# Altium PCB Deck_PCBV1.PcbDoc
Units mm, origin at the board's own origin, x right, y up, seen from the top; angles counter-clockwise.
Board outline 90 x 50 mm, 2 copper layers (Top Layer, Bottom Layer); 28 components, 24 nets, 128 pads, 29 vias.
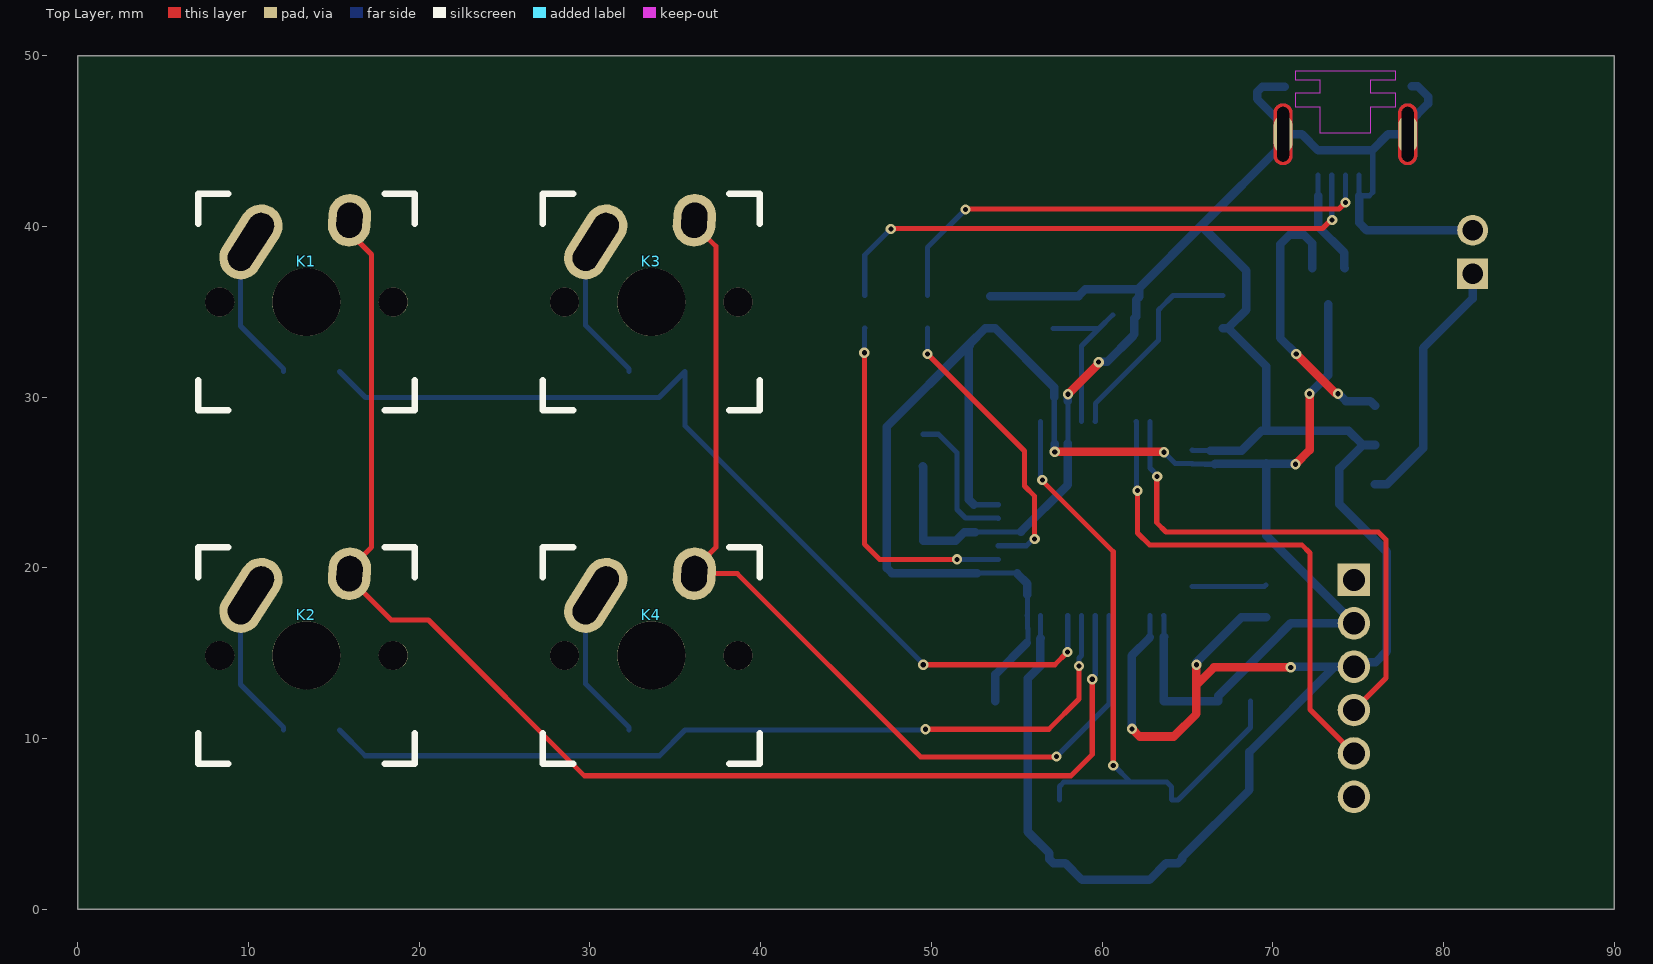
[diagram p0: Top Layer view]
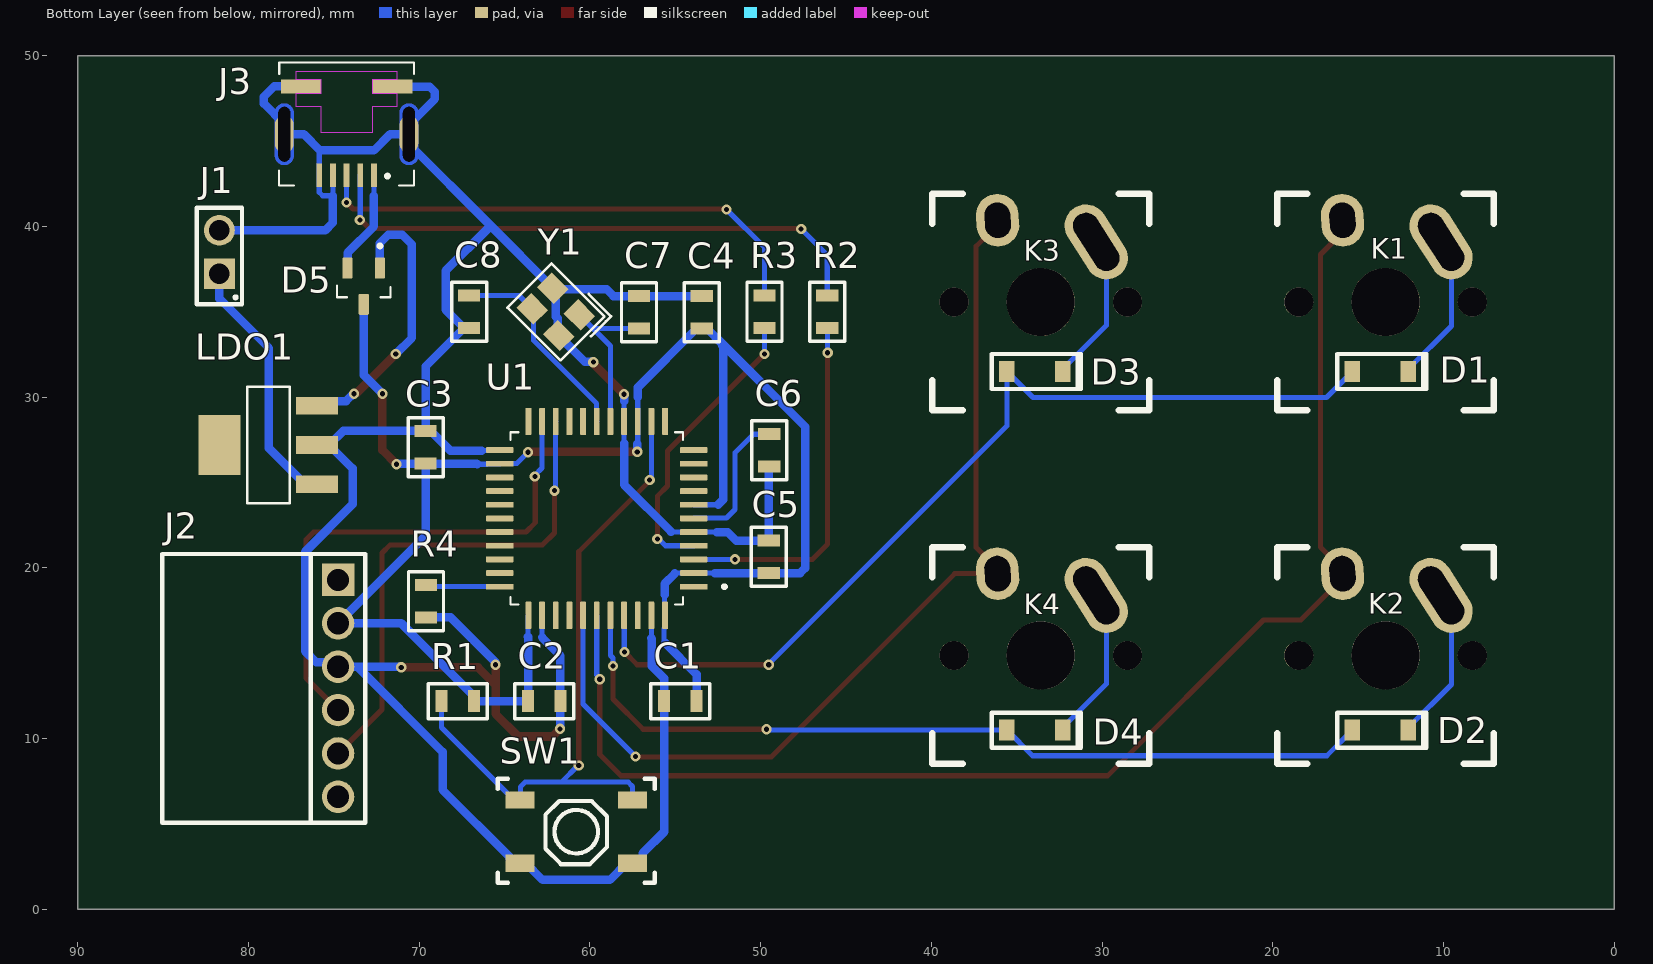
[diagram p1: Bottom Layer view, seen from below]
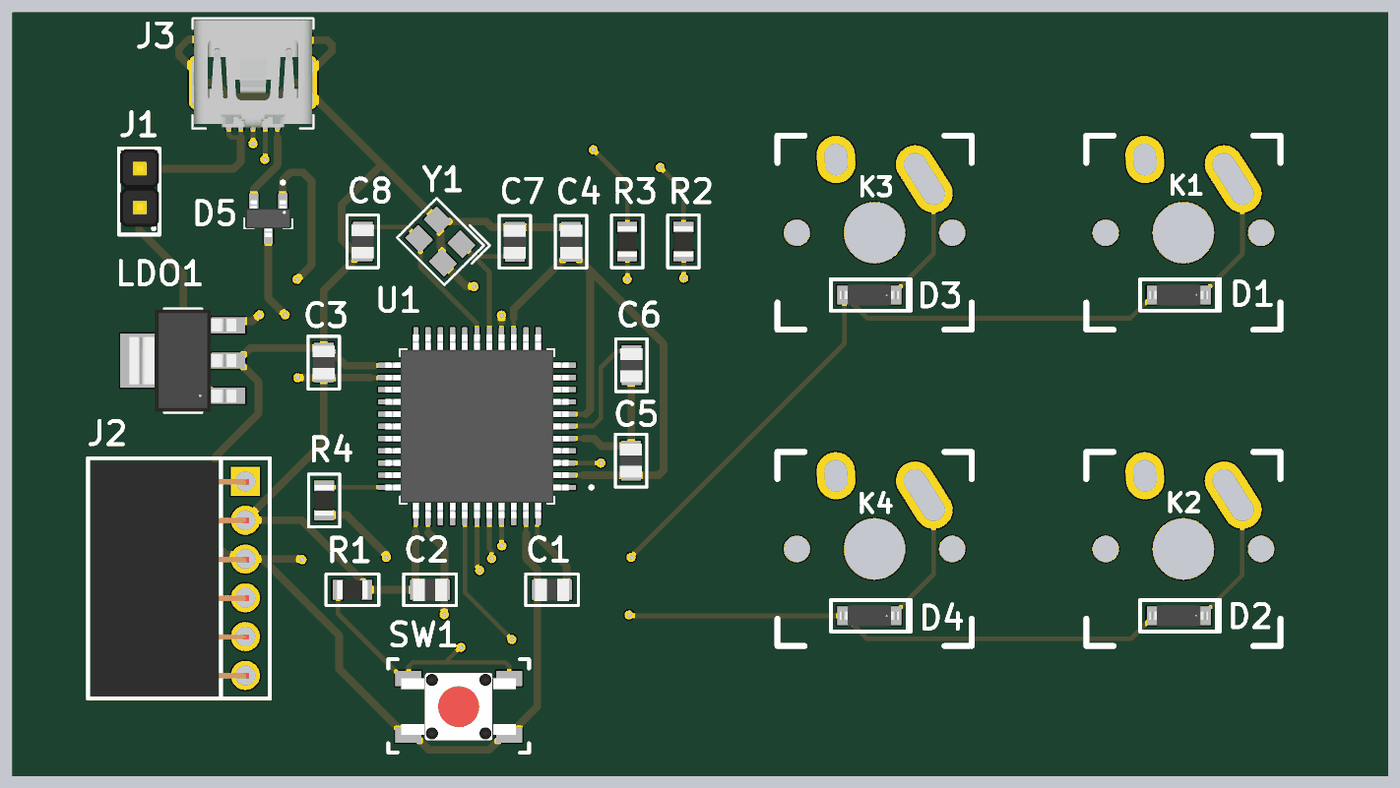
[diagram p2: 3D render of the assembled board from below, using the file's embedded part models]

## Layer stack, top to bottom
Top Solder: solder mask 0.0102, Solder Resist, Dk 3.5
Top Layer: signal copper 0.0356
Dielectric 1: dielectric 0.32, FR-4, Dk 4.8
Bottom Layer: signal copper 0.0356
Bottom Solder: solder mask 0.0102, Solder Resist, Dk 3.5

## Board outline
0,0 90,0 90,50 0,50

## Design rules (kind name [scope] priority, off if disabled: settings)
Clearance [All] p1: gap=0.2 ignorepadtopadclearanceinfootprint=TRUE
HoleSize [All] p1: absolutevalues=TRUE maxlimit=6 minlimit=0.025 maxpercent=80.000 minpercent=20.000
PolygonConnect [All] p1: connectstyle=Relief reliefconductorwidth=0.254 reliefentries=4 polygonreliefangle="90 Angle" airgapwidth=0.254
RoutingVias [All] p1: holewidth=0.3 width=0.6 viastyle="Through Hole" minholewidth=0.3 minwidth=0.6 maxholewidth=0.3 maxwidth=0.6
SMDNeckDown [All] p1: percent=100.000
SolderMaskExpansion [All] p1: expansion=0.102 istentingtop=FALSE
Width [All] p1: maxlimit=0.5 minlimit=0.2 preferedwidth=0.3
29 further rules are at their usual default settings.

## Components (designator, comment, footprint, x,y, rotation, side; value= is the part's Value field where it differs from the comment)
C1 "C 0.1uf" C0805 54.7,12.2 r180 bottom
C2 "C 0.1uf" C0805 62.675,12.2 r0 bottom
C3 "C 0.1uf" C0805 69.625,27.075 r270 bottom
C4 "C 0.1uf" C0805 53.45,34.975 r270 bottom
C5 "C 4.7uf" C0805 49.525,20.65 r270 bottom
C6 "C 1uf" C0805 49.5,26.9 r90 bottom
C7 "C 22pf" C0805 57.125,34.975 r270 bottom
C8 "C 22pf" C0805 67.075,35 r90 bottom
D1 "Diode" Diode 13.7,31.5 r0 bottom
D2 "Diode" Diode 13.7,10.5 r0 bottom
D3 "Diode" Diode 33.938,31.5 r0 bottom
D4 "Diode" Diode 33.938,10.5 r0 bottom
D5 "Schottky diode" SOT95P237X111-3N 73.25,36.5 r270 bottom
J1 "Battery" HDR-TH_2P-P2.54-V-M-1 81.7,38.5 r90 bottom
J2 "Header" HDR-TH_6P-P2.54-H-W8.6_A2541HWR-6P 74.75,12.945 r270 bottom
J3 "USB" USB 74.25,49.1 r0 bottom
K1 "Switch" Mx_Alps_100 13.399,35.574 r0 top
K2 "Switch" Mx_Alps_100 13.4,14.874 r0 top
K3 "Switch" Mx_Alps_100 33.599,35.574 r0 top
K4 "Switch" Mx_Alps_100 33.599,14.874 r0 top
LDO1 "5V regulator" SOT-223_L6.5-W3.5-P2.30-LS7.0-BR 78.842,27.2 r180 bottom
R1 "R 10kohm" R0805 67.75,12.2 r0 bottom
R2 "R 22ohm" R0805 46.1,35 r90 bottom
R3 "R 22ohm" R0805 49.775,35 r90 bottom
R4 "R 10kohm" R0805 69.6,18.05 r270 bottom
SW1 "Button" SW-SMD_4P-L5.1-W5.1-P3.70-LS6.5-TL-2 60.8,4.55 r180 bottom
U1 "ATMEGA32U4" ATMEGA32U2-AUR 59.6,22.9 r0 bottom
Y1 "Crystal" CRYSTAL-SMD_4P-L3.2-W2.5-BL 62,35 r45 bottom (schematic designator CRYSTAL1)

## Footprints (in the part's own frame and the unit in brackets; to place one, negate y for a bottom-side part, rotate by r counter-clockwise, add the part's x,y. Pads: shape width x height; smd on the part's side, far side on the other; paste and mask are expansions set on the pad)
ATMEGA32U2-AUR [mm]
  rrect25% 1.6x0.34 smd: 1(-5.68,4) 2(-5.68,3.2) 3(-5.68,2.4) 4(-5.68,1.6) 5(-5.68,0.8) 6(-5.68,0) 7(-5.68,-0.8) 8(-5.68,-1.6) 9(-5.68,-2.4) 10(-5.68,-3.2) 11(-5.68,-4) 23(5.68,-4) 24(5.68,-3.2) 25(5.68,-2.4) 26(5.68,-1.6) 27(5.68,-0.8) 28(5.68,0) 29(5.68,0.8) 30(5.68,1.6) 31(5.68,2.4) 32(5.68,3.2) 33(5.68,4)
  rrect25% 0.34x1.6 smd: 12(-4,-5.68) 13(-3.2,-5.68) 14(-2.4,-5.68) 15(-1.6,-5.68) 16(-0.8,-5.68) 17(0,-5.68) 18(0.8,-5.68) 19(1.6,-5.68) 20(2.4,-5.68) 21(3.2,-5.68) 22(4,-5.68) 34(4,5.68) 35(3.2,5.68) 36(2.4,5.68) 37(1.6,5.68) 38(0.8,5.68) 39(0,5.68) 40(-0.8,5.68) 41(-1.6,5.68) 42(-2.4,5.68) 43(-3.2,5.68) 44(-4,5.68)
  silkscreen extent -7.58,-5.05 5.05,5.05, body extent -6,-6 6,6, height 1.21
C0805 [mm]
  rect 0.7x1.3 smd: 1(-0.95,0) 2(0.95,0)
  silkscreen extent -1.72,-1.02 1.72,1.02, body extent -1.1,-0.72 1.11,0.72, height 1.45
CRYSTAL-SMD_4P-L3.2-W2.5-BL [mm]
  rect 1.4x1.2 smd: 1(-1.1,-0.85) 2(1.1,-0.85) 3(1.1,0.85) 4(-1.1,0.85)
  silkscreen extent -2.48,-2.1 2.17,1.82
Diode [mil]
  rect 36x48 smd: 1(-64.5,0) 2(64.5,0)
  silkscreen extent -109,-40 99,40, body extent -76,-27 76,27, height 32
HDR-TH_2P-P2.54-V-M-1 [mm]
  rect 1.8x1.8 hole 1.2: 1(-1.27,0)
  round 1.8 hole 1.2: 2(1.27,0)
  silkscreen extent -3.05,-1.33 2.6,1.33, body extent -2.54,-1.3 2.54,1.24, height 8
HDR-TH_6P-P2.54-H-W8.6_A2541HWR-6P [mm]
  rect 1.9x1.9 hole 1.3: 1(-6.35,0)
  round 1.9 hole 1.3: 2(-3.81,0) 3(-1.27,0) 4(1.27,0) 5(3.81,0) 6(6.35,0)
  silkscreen extent -7.87,-10.3 7.87,1.6, body extent -7.6,-10.12 7.64,0.23, height 2.5
Mx_Alps_100 [mil]
  rrect100% 98.43x187.01 hole 147.64 slot 59.06 at 147.5 deg rot 147.5: 1(-128.15,138.58)
  rrect100% 98.43x121.26 hole 81.89 slot 59.06 at 176.1 deg rot 176.1: 2(99.21,188.58)
  round 157 hole 157: Un1(0,0)
  round 67 hole 67: Un2(-200,0) Un3(200,0)
  silkscreen extent -250,-250 250,250
R0805 [mm]
  rect 0.7x1.3 smd: 1(-0.95,0) 2(0.95,0)
  silkscreen extent -1.72,-1.02 1.72,1.02, body extent -1,-0.62 1,0.63, height 0.5
SOT95P237X111-3N [mm]
  rrect25% 1.23x0.6 smd: 1(-1.06,0.95) 2(-1.06,-0.95) 3(1.06,0)
  silkscreen extent -2.46,-1.56 0.65,1.56, body extent -1.2,-1.45 1.2,1.45, height 1.11
SOT-223_L6.5-W3.5-P2.30-LS7.0-BR [mm]
  rect 2.465x1.05 smd: 1(2.857,-2.3) 2(2.857,0) 3(2.857,2.3)
  rect 2.465x3.54 smd: 4(-2.858,0)
  silkscreen extent -1.22,-3.4 1.25,3.4, body extent -3.5,-3.35 3.5,3.35, height 1.81
SW-SMD_4P-L5.1-W5.1-P3.70-LS6.5-TL-2 [mm]
  rect 1.7x1 smd: 1(-3.3,1.849) 2(3.3,1.85) 3(-3.3,-1.85) 4(3.3,-1.85)
  silkscreen extent -4.6,-3 4.6,3.1, body extent -3.75,-2.25 3.75,2.25, height 3.8
USB [mm]
  rect 0.34x1.4 smd: 1(-1.6,6.1) 2(-0.8,6.1) 3(0,6.1) 4(0.8,6.1) 5(1.6,6.1)
  oval 1.1x2.2 hole 0.7 slot 3.2 at 90 deg: S1(-3.65,3.7) S2(3.65,3.7)
  rect 2.35x0.8 smd: S3(-2.675,0.9) S4(2.675,0.9)
  Top Layer region: 3.679,5.499 3.707,5.497 3.736,5.493 3.764,5.488 3.792,5.481 3.82,5.473 3.847,5.463 3.874,5.452 3.9,5.44 3.925,5.426 3.95,5.411 3.973,5.395 3.996,5.377 4.018,5.359 4.039,5.339 4.059,5.318 4.077,5.296 4.095,5.273 4.111,5.25 4.126,5.225 4.14,5.2 4.152,5.174 4.163,5.147 4.173,5.12 4.181,5.092 4.188,5.064 4.193,5.036 4.197,5.007 4.199,4.979 4.2,4.95 4.2,2.45 4.199,2.421 4.197,2.393 4.193,2.364 4.188,2.336 4.181,2.308 4.173,2.28 4.163,2.253 4.152,2.226 4.14,2.2 4.126,2.175 4.111,2.15 4.095,2.127 4.077,2.104 4.059,2.082 4.039,2.061 4.018,2.041 3.996,2.023 3.973,2.005 3.95,1.989 3.925,1.974 3.9,1.96 3.874,1.948 3.847,1.937 3.82,1.927 3.792,1.919 3.764,1.912 3.736,1.907 3.707,1.903 3.679,1.901 3.65,1.9 3.621,1.901 3.593,1.903 3.564,1.907 3.536,1.912 3.508,1.919 3.48,1.927 3.453,1.937 3.426,1.948 3.4,1.96 3.375,1.974 3.35,1.989 3.327,2.005 3.304,2.023 3.282,2.041 3.261,2.061 3.241,2.082 3.223,2.104 3.205,2.127 3.189,2.15 3.174,2.175 3.16,2.2 3.148,2.226 3.137,2.253 3.127,2.28 3.119,2.308 3.112,2.336 3.107,2.364 3.103,2.393 3.101,2.421 3.1,2.45 3.1,4.95 3.101,4.979 3.103,5.007 3.107,5.036 3.112,5.064 3.119,5.092 3.127,5.12 3.137,5.147 3.148,5.174 3.16,5.2 3.174,5.225 3.189,5.25 3.205,5.273 3.223,5.296 3.241,5.318 3.261,5.339 3.282,5.359 3.304,5.377 3.327,5.395 3.35,5.411 3.375,5.426 3.4,5.44 3.426,5.452 3.453,5.463 3.48,5.473 3.508,5.481 3.536,5.488 3.564,5.493 3.593,5.497 3.621,5.499 3.65,5.5
  Top Layer region: -3.621,5.499 -3.593,5.497 -3.564,5.493 -3.536,5.488 -3.508,5.481 -3.48,5.473 -3.453,5.463 -3.426,5.452 -3.4,5.44 -3.375,5.426 -3.35,5.411 -3.327,5.395 -3.304,5.377 -3.282,5.359 -3.261,5.339 -3.241,5.318 -3.223,5.296 -3.205,5.273 -3.189,5.25 -3.174,5.225 -3.16,5.2 -3.148,5.174 -3.137,5.147 -3.127,5.12 -3.119,5.092 -3.112,5.064 -3.107,5.036 -3.103,5.007 -3.101,4.979 -3.1,4.95 -3.1,2.45 -3.101,2.421 -3.103,2.393 -3.107,2.364 -3.112,2.336 -3.119,2.308 -3.127,2.28 -3.137,2.253 -3.148,2.226 -3.16,2.2 -3.174,2.175 -3.189,2.15 -3.205,2.127 -3.223,2.104 -3.241,2.082 -3.261,2.061 -3.282,2.041 -3.304,2.023 -3.327,2.005 -3.35,1.989 -3.375,1.974 -3.4,1.96 -3.426,1.948 -3.453,1.937 -3.48,1.927 -3.508,1.919 -3.536,1.912 -3.564,1.907 -3.593,1.903 -3.621,1.901 -3.65,1.9 -3.679,1.901 -3.707,1.903 -3.736,1.907 -3.764,1.912 -3.792,1.919 -3.82,1.927 -3.847,1.937 -3.874,1.948 -3.9,1.96 -3.925,1.974 -3.95,1.989 -3.973,2.005 -3.996,2.023 -4.018,2.041 -4.039,2.061 -4.059,2.082 -4.077,2.104 -4.095,2.127 -4.111,2.15 -4.126,2.175 -4.14,2.2 -4.152,2.226 -4.163,2.253 -4.173,2.28 -4.181,2.308 -4.188,2.336 -4.193,2.364 -4.197,2.393 -4.199,2.421 -4.2,2.45 -4.2,4.95 -4.199,4.979 -4.197,5.007 -4.193,5.036 -4.188,5.064 -4.181,5.092 -4.173,5.12 -4.163,5.147 -4.152,5.174 -4.14,5.2 -4.126,5.225 -4.111,5.25 -4.095,5.273 -4.077,5.296 -4.059,5.318 -4.039,5.339 -4.018,5.359 -3.996,5.377 -3.973,5.395 -3.95,5.411 -3.925,5.426 -3.9,5.44 -3.874,5.452 -3.847,5.463 -3.82,5.473 -3.792,5.481 -3.764,5.488 -3.736,5.493 -3.707,5.497 -3.679,5.499 -3.65,5.5
  Bottom Layer region: -3.621,5.499 -3.593,5.497 -3.564,5.493 -3.536,5.488 -3.508,5.481 -3.48,5.473 -3.453,5.463 -3.426,5.452 -3.4,5.44 -3.375,5.426 -3.35,5.411 -3.327,5.395 -3.304,5.377 -3.282,5.359 -3.261,5.339 -3.241,5.318 -3.223,5.296 -3.205,5.273 -3.189,5.25 -3.174,5.225 -3.16,5.2 -3.148,5.174 -3.137,5.147 -3.127,5.12 -3.119,5.092 -3.112,5.064 -3.107,5.036 -3.103,5.007 -3.101,4.979 -3.1,4.95 -3.1,2.45 -3.101,2.421 -3.103,2.393 -3.107,2.364 -3.112,2.336 -3.119,2.308 -3.127,2.28 -3.137,2.253 -3.148,2.226 -3.16,2.2 -3.174,2.175 -3.189,2.15 -3.205,2.127 -3.223,2.104 -3.241,2.082 -3.261,2.061 -3.282,2.041 -3.304,2.023 -3.327,2.005 -3.35,1.989 -3.375,1.974 -3.4,1.96 -3.426,1.948 -3.453,1.937 -3.48,1.927 -3.508,1.919 -3.536,1.912 -3.564,1.907 -3.593,1.903 -3.621,1.901 -3.65,1.9 -3.679,1.901 -3.707,1.903 -3.736,1.907 -3.764,1.912 -3.792,1.919 -3.82,1.927 -3.847,1.937 -3.874,1.948 -3.9,1.96 -3.925,1.974 -3.95,1.989 -3.973,2.005 -3.996,2.023 -4.018,2.041 -4.039,2.061 -4.059,2.082 -4.077,2.104 -4.095,2.127 -4.111,2.15 -4.126,2.175 -4.14,2.2 -4.152,2.226 -4.163,2.253 -4.173,2.28 -4.181,2.308 -4.188,2.336 -4.193,2.364 -4.197,2.393 -4.199,2.421 -4.2,2.45 -4.2,4.95 -4.199,4.979 -4.197,5.007 -4.193,5.036 -4.188,5.064 -4.181,5.092 -4.173,5.12 -4.163,5.147 -4.152,5.174 -4.14,5.2 -4.126,5.225 -4.111,5.25 -4.095,5.273 -4.077,5.296 -4.059,5.318 -4.039,5.339 -4.018,5.359 -3.996,5.377 -3.973,5.395 -3.95,5.411 -3.925,5.426 -3.9,5.44 -3.874,5.452 -3.847,5.463 -3.82,5.473 -3.792,5.481 -3.764,5.488 -3.736,5.493 -3.707,5.497 -3.679,5.499 -3.65,5.5
  Bottom Layer region: 3.679,5.499 3.707,5.497 3.736,5.493 3.764,5.488 3.792,5.481 3.82,5.473 3.847,5.463 3.874,5.452 3.9,5.44 3.925,5.426 3.95,5.411 3.973,5.395 3.996,5.377 4.018,5.359 4.039,5.339 4.059,5.318 4.077,5.296 4.095,5.273 4.111,5.25 4.126,5.225 4.14,5.2 4.152,5.174 4.163,5.147 4.173,5.12 4.181,5.092 4.188,5.064 4.193,5.036 4.197,5.007 4.199,4.979 4.2,4.95 4.2,2.45 4.199,2.421 4.197,2.393 4.193,2.364 4.188,2.336 4.181,2.308 4.173,2.28 4.163,2.253 4.152,2.226 4.14,2.2 4.126,2.175 4.111,2.15 4.095,2.127 4.077,2.104 4.059,2.082 4.039,2.061 4.018,2.041 3.996,2.023 3.973,2.005 3.95,1.989 3.925,1.974 3.9,1.96 3.874,1.948 3.847,1.937 3.82,1.927 3.792,1.919 3.764,1.912 3.736,1.907 3.707,1.903 3.679,1.901 3.65,1.9 3.621,1.901 3.593,1.903 3.564,1.907 3.536,1.912 3.508,1.919 3.48,1.927 3.453,1.937 3.426,1.948 3.4,1.96 3.375,1.974 3.35,1.989 3.327,2.005 3.304,2.023 3.282,2.041 3.261,2.061 3.241,2.082 3.223,2.104 3.205,2.127 3.189,2.15 3.174,2.175 3.16,2.2 3.148,2.226 3.137,2.253 3.127,2.28 3.119,2.308 3.112,2.336 3.107,2.364 3.103,2.393 3.101,2.421 3.1,2.45 3.1,4.95 3.101,4.979 3.103,5.007 3.107,5.036 3.112,5.064 3.119,5.092 3.127,5.12 3.137,5.147 3.148,5.174 3.16,5.2 3.174,5.225 3.189,5.25 3.205,5.273 3.223,5.296 3.241,5.318 3.261,5.339 3.282,5.359 3.304,5.377 3.327,5.395 3.35,5.411 3.375,5.426 3.4,5.44 3.426,5.452 3.453,5.463 3.48,5.473 3.508,5.481 3.536,5.488 3.564,5.493 3.593,5.497 3.621,5.499 3.65,5.5
  Keep-Out Layer region: 1.5,2.1 2.95,2.1 2.95,1.3 1.5,1.3 1.5,0.5 2.95,0.5 2.95,0 -2.95,0 -2.95,0.5 -1.5,0.5 -1.5,1.3 -2.95,1.3 -2.95,2.1 -1.5,2.1 -1.5,3.6 1.5,3.6
  silkscreen extent -3.95,-0.5 3.96,6.71, body extent -3.85,-0.38 3.85,6.62, height 3.94

## Part data
C1 C2 C3 C4: library part CC0805ZRY5V9BB104, "YAGEO (PHYCOMP)         CC0805ZRY5V9BB104             SMD Multilayer Ceramic Capacitor, 0805 [2012 Metric], 0.1 F, 50 V, +80%, -20%, Y5V, CC Series", Capacitance=100nF, Case Code (Imperial)=0805, Case Code (Metric)=2012, Dielectric=Y5V, Dielectric Material=Ceramic, Manufacturer=Yageo, Max Operating Temperature=85°C, Min Operating Temperature=-30°C, Package Quantity=1, Supplier Part Number 1=311-1361-1-ND, Tolerance=80%, Voltage Rating=50V, Case/Package=0805, Category="Ceramic Capacitors", ComponentLink1Description=https://datasheet.ciiva.com/144/mlccorderingcode-144209.pdf?src-supplier=Digi-Key, ComponentLink1URL=https://datasheet.ciiva.com/144/mlccorderingcode-144209.pdf?src-supplier=Digi-Key, ComponentLink2Description=https://datasheet.ciiva.com/144/mlccorderingcode-144210.pdf?src-supplier=Digi-Key, ComponentLink2URL=https://datasheet.ciiva.com/144/mlccorderingcode-144210.pdf?src-supplier=Digi-Key, ComponentLink3Description=https://datasheet.ciiva.com/144/mlccorderingcode-144211.pdf?src-supplier=Digi-Key, ComponentLink3URL=https://datasheet.ciiva.com/144/mlccorderingcode-144211.pdf?src-supplier=Digi-Key, ComponentLink4Description=https://datasheet.ciiva.com/15189/getdatasheetpartid-55882-15189238.pdf?src-supplier=Verical, ComponentLink4URL=https://datasheet.ciiva.com/15189/getdatasheetpartid-55882-15189238.pdf?src-supplier=Verical, ComponentLink5Description=https://datasheet.ciiva.com/28450/1132289-28450870.pdf?src-supplier=Element14, ComponentLink5URL=https://datasheet.ciiva.com/28450/1132289-28450870.pdf?src-supplier=Element14, ComponentLink6Description=https://datasheet.ciiva.com/13389/upy-gp-np0-16v-to-50v-8-13389351.pdf?src-supplier=Mouser, ComponentLink6URL=https://datasheet.ciiva.com/13389/upy-gp-np0-16v-to-50v-8-13389351.pdf?src-supplier=Mouser, ComponentLink7Description=https://datasheet.ciiva.com/11465/upy-gphc-y5v-6-3v-to-50v-5-11465865.pdf?src-supplier=Avnet, ComponentLink7URL=https://datasheet.ciiva.com/11465/upy-gphc-y5v-6-3v-to-50v-5-11465865.pdf?src-supplier=Avnet, ComponentLink8Description=https://datasheet.ciiva.com/16747/upy-gphc-y5v-6-3v-to-50v-5-revised-16747323.pdf?src-supplier=Future+Electronics, ComponentLink8URL=https://datasheet.ciiva.com/16747/upy-gphc-y5v-6-3v-to-50v-5-revised-16747323.pdf?src-supplier=Future+Electronics, ComponentLink9Description=https://datasheet.ciiva.com/17435/upy-gphc-y5v-6-3v-to-50v-5-17435053.pdf?src-supplier=Avnet+Europe, ComponentLink9URL=https://datasheet.ciiva.com/17435/upy-gphc-y5v-6-3v-to-50v-5-17435053.pdf?src-supplier=Avnet+Europe, ComponentLink10Description=https://datasheet.ciiva.com/29241/445331-da-01-en-kerko-chip-0805-y5v0-1uf-20-80proz50vg-29241946.pdf?src-supplier=Conrad, ComponentLink10URL=https://datasheet.ciiva.com/29241/445331-da-01-en-kerko-chip-0805-y5v0-1uf-20-80proz50vg-29241946.pdf?src-supplier=Conrad, Construction=Flat, Depth=1.25mm, Halogen Free="Halogen Free", Height=0.6mm, Lead Free="Lead Free", Length=2mm, Manufacturer Part Number=CC0805ZRY5V9BB104, Material=Ceramic, Mount="Surface Mount", Number of Pins=2, Packaging="Tape and Reel", Pricing 1="1=0.10000, 10=0.07000, 50=0.03800, 100=0.03100, 500=0.02214, 1000=0.01739 (USD)", Radiation Hardening=No, REACH SVHC="No SVHC", Resistor Type=Ceramic, RoHS=Yes, RoHS Compliant=Yes, Series=CC, Stock 1=165123, Supplier 1=Digi-Key, Termination=SMD/SMT, Thickness=0.024inch, Voltage Rating (DC)=50V, Width=0.049inch
C5: library part CL21A475KAQNNNE, "SAMSUNG ELECTRO-MECHANICS - CL21A475KAQNNNE - SMD Multilayer Ceramic Capacitor, 4.7 µF, 25 V, 0805 [2012 Metric], ± 10%, X5R, CL Series", Capacitance=4.7uF, Case Code (Imperial)=0805, Case Code (Metric)=2012, Dielectric=X5R, Manufacturer=Samsung, Max Operating Temperature=85°C, Min Operating Temperature=-55°C, Package Quantity=1, Supplier Part Number 1=1276-1244-1-ND, Tolerance=10%, Voltage Rating=25V, Case/Package=0805, Category="Ceramic Capacitors", ComponentLink1Description=https://datasheet.ciiva.com/25798/cl21a475kaqnnne-25798882.pdf?src-supplier=Digi-Key, ComponentLink1URL=https://datasheet.ciiva.com/25798/cl21a475kaqnnne-25798882.pdf?src-supplier=Digi-Key, Construction=Flat, Depth=1.25mm, Height=1.25mm, Lead Free="Lead Free", Length=2mm, Manufacturer Part Number=CL21A475KAQNNNE, Mount="Surface Mount", Packaging="Tape and Reel", Pricing 1="1=0.12000, 10=0.08300, 50=0.04700, 100=0.03890, 500=0.02728, 1000=0.02259 (USD)", Radiation Hardening=No, RoHS=Yes, RoHS Compliant=Yes, Series=CL, Supplier 1=Digi-Key, Thickness=0.055inch, Voltage Rating (DC)=25V, Width=0.049inch
C6: library part CL21B105KBFNNNE, "SAMSUNG ELECTRO-MECHANICS - CL21B105KBFNNNE - SMD Multilayer Ceramic Capacitor, 1 µF, 50 V, 0805 [2012 Metric], ± 10%, X7R, CL Series", Capacitance=1uF, Case Code (Imperial)=0805, Case Code (Metric)=2012, Dielectric=X7R, Manufacturer=Samsung, Max Operating Temperature=125°C, Min Operating Temperature=-55°C, Package Quantity=1, Supplier Part Number 1=1276-1029-1-ND, Tolerance=10%, Voltage=50V, Case/Package=0805, Category="Ceramic Capacitors", ComponentLink1Description=https://datasheet.ciiva.com/25800/cl21b105kbfnnne-25800291.pdf?src-supplier=Digi-Key, ComponentLink1URL=https://datasheet.ciiva.com/25800/cl21b105kbfnnne-25800291.pdf?src-supplier=Digi-Key, ComponentLink2Description=https://datasheet.ciiva.com/16449/cl21b105kbfnnne-16449003.pdf?src-supplier=Future+Electronics, ComponentLink2URL=https://datasheet.ciiva.com/16449/cl21b105kbfnnne-16449003.pdf?src-supplier=Future+Electronics, ComponentLink3Description=https://datasheet.ciiva.com/26838/getdatasheetpartid-354075-26838668.pdf?src-supplier=Verical, ComponentLink3URL=https://datasheet.ciiva.com/26838/getdatasheetpartid-354075-26838668.pdf?src-supplier=Verical, Construction=Flat, Depth=1.25mm, Height=1.25mm, Length=2mm, Manufacturer Part Number=CL21B105KBFNNNE, Mount="Surface Mount", Packaging="Tape and Reel", Pricing 1="1=0.13000, 10=0.09000, 50=0.05120, 100=0.04250, 500=0.02978, 1000=0.02465 (USD)", Radiation Hardening=No, RoHS=Yes, RoHS Compliant=Yes, Series=CL, Supplier 1=Digi-Key, Thickness=0.053inch, Voltage Rating=50V, Width=0.049inch
C7 C8: library part CL21C220JBANNNC, "Cap Ceramic 22pF 50V C0G 5% SMD 0805 125C T/R", Capacitance=22pF, Case Code (Imperial)=0805, Case Code (Metric)=2012, Dielectric=C0G, Manufacturer=Samsung, Max Operating Temperature=125°C, Min Operating Temperature=-55°C, Package Quantity=1, Supplier Part Number 1=1276-1047-1-ND, Temperature Coefficient=300ppm/°C, Tolerance=5%, Voltage=50V, Case/Package=0805, Category="Ceramic Capacitors", ComponentLink1Description=https://datasheet.ciiva.com/25801/cl21c220jbannnc-25801668.pdf?src-supplier=Digi-Key, ComponentLink1URL=https://datasheet.ciiva.com/25801/cl21c220jbannnc-25801668.pdf?src-supplier=Digi-Key, ComponentLink2Description=https://datasheet.ciiva.com/15227/getdatasheetpartid-355345-15227198.pdf?src-supplier=Verical, ComponentLink2URL=https://datasheet.ciiva.com/15227/getdatasheetpartid-355345-15227198.pdf?src-supplier=Verical, ComponentLink3Description=https://datasheet.ciiva.com/29199/454687-da-01-en-vs-kondensator-0805-29199501.pdf?src-supplier=Conrad, ComponentLink3URL=https://datasheet.ciiva.com/29199/454687-da-01-en-vs-kondensator-0805-29199501.pdf?src-supplier=Conrad, ComponentLink4Description=https://datasheet.ciiva.com/16387/cl05b104kq5nnnc-16387287.pdf?src-supplier=Future+Electronics, ComponentLink4URL=https://datasheet.ciiva.com/16387/cl05b104kq5nnnc-16387287.pdf?src-supplier=Future+Electronics, Contact Plating=Tin, Depth=1.25mm, Height=0.65mm, Lead Free="Lead Free", Length=2mm, Manufacturer Part Number=CL21C220JBANNNC, Material=Ceramic, Mount="Surface Mount", Packaging="Tape and Reel", Pricing 1="1=0.10000, 10=0.05400, 50=0.02940, 100=0.02390, 500=0.01710, 1000=0.01344 (USD)", Radiation Hardening=No, RoHS=Yes, Stock 1=3782, Supplier 1=Digi-Key, Thickness=0.03inch, Voltage Rating=50V, Voltage Rating (DC)=50V, Width=0.049inch
D1 D2 D3 D4: library part 1N4148W-TP, "MICRO COMMERCIAL COMPONENTS - 1N4148W-TP - SWITCHING DIODE, 150mA, 100V, SOD123, FU", Average Rectified Current=150mA, Capacitance=4pF, Forward Voltage=1V, Manufacturer=MCC, Max Forward Surge Current (Ifsm)=1A, Max Operating Temperature=150°C, Max Repetitive Reverse Voltage (Vrrm)=100V, Max Reverse Leakage Current=5uA, Max Surge Current=2A, Min Operating Temperature=-65°C, Package Quantity=3000, Power Dissipation=400mW, Supplier Part Number 1=1N4148WTPMSCT-ND, Category="Rectifier Diodes", ComponentLink1Description=https://datasheet.ciiva.com/1243/1684829-1243908.pdf?src-supplier=Newark, ComponentLink1URL=https://datasheet.ciiva.com/1243/1684829-1243908.pdf?src-supplier=Newark, ComponentLink2Description=https://datasheet.ciiva.com/16836/1n4148wsod123-16836277.pdf?src-supplier=Future+Electronics, ComponentLink2URL=https://datasheet.ciiva.com/16836/1n4148wsod123-16836277.pdf?src-supplier=Future+Electronics, ComponentLink3Description=https://datasheet.ciiva.com/4435/1n4148wsod123-48460-4435223.pdf?src-supplier=Mouser, ComponentLink3URL=https://datasheet.ciiva.com/4435/1n4148wsod123-48460-4435223.pdf?src-supplier=Mouser, ComponentLink4Description=https://datasheet.ciiva.com/14557/70055519-14557767.pdf?src-supplier=Allied+Electronics, ComponentLink4URL=https://datasheet.ciiva.com/14557/70055519-14557767.pdf?src-supplier=Allied+Electronics, ComponentLink5Description=https://datasheet.ciiva.com/911/1n4148wsod123-911676.pdf?src-supplier=Digi-Key, ComponentLink5URL=https://datasheet.ciiva.com/911/1n4148wsod123-911676.pdf?src-supplier=Digi-Key, ComponentLink6Description=https://datasheet.ciiva.com/7622/1684829-7622556.pdf?src-supplier=Element14, ComponentLink6URL=https://datasheet.ciiva.com/7622/1684829-7622556.pdf?src-supplier=Element14, ComponentLink7Description=https://datasheet.ciiva.com/911/1n4148wsod123-911677.pdf?src-supplier=Digi-Key, ComponentLink7URL=https://datasheet.ciiva.com/911/1n4148wsod123-911677.pdf?src-supplier=Digi-Key, ComponentLink8Description=https://datasheet.ciiva.com/911/1n4148wsod123-911678.pdf?src-supplier=Digi-Key, ComponentLink8URL=https://datasheet.ciiva.com/911/1n4148wsod123-911678.pdf?src-supplier=Digi-Key, ComponentLink9Description=https://datasheet.ciiva.com/22747/1684829-22747439.pdf?src-supplier=Element14, ComponentLink9URL=https://datasheet.ciiva.com/22747/1684829-22747439.pdf?src-supplier=Element14, Current Rating=150mA, Element Configuration=Single, Forward Current=150mA, Height=1.2mm, Lead Free="Lead Free", Length=2.85mm, Manufacturer Part Number=1N4148W-TP, Max Reverse Voltage (DC)=100V, Mount="Surface Mount", Number of Pins=2, Output Current=150mA, Packaging="Tape and Reel", Peak Non-Repetitive Surge Current=2A, Polarity=Standard, Pricing 1="1=0.19000, 10=0.17300, 100=0.09440, 500=0.05808, 1000=0.03960 (USD)", Radiation Hardening=No, REACH SVHC=Unknown, Recovery Time=4ns, Reverse Recovery Time=4ns, RoHS=Yes, Stock 1=2236013, Supplier 1=Digi-Key, Voltage Rating (DC)=100V, Width=1.8mm
D5: library part BAT54CLT1G, "Diode Schottky 30V 0.2A 3-Pin SOT-23 T/R", Average Rectified Current=200mA, Capacitance=10pF, Case/Package=SOT-23-3, Forward Voltage=800mV, Manufacturer="ON Semiconductor", Max Forward Surge Current (Ifsm)=600mA, Max Operating Temperature=125°C, Max Power Dissipation=225mW, Max Repetitive Reverse Voltage (Vrrm)=30V, Max Reverse Current=2uA, Min Operating Temperature=-55°C, Package Quantity=3000, Supplier Part Number 1=BAT54CLT1GOSCT-ND, Category="Schottky Diodes", ComponentLink1Description=https://datasheet.ciiva.com/1240/bat54clt1-d-1240707.pdf?src-supplier=Newark, ComponentLink1URL=https://datasheet.ciiva.com/1240/bat54clt1-d-1240707.pdf?src-supplier=Newark, ComponentLink2Description=https://datasheet.ciiva.com/30479/0900766b8121b932-30479128.pdf?src-supplier=RSComponents, ComponentLink2URL=https://datasheet.ciiva.com/30479/0900766b8121b932-30479128.pdf?src-supplier=RSComponents, ComponentLink3Description=https://datasheet.ciiva.com/34301/885769-34301654.pdf?src-supplier=Jameco, ComponentLink3URL=https://datasheet.ciiva.com/34301/885769-34301654.pdf?src-supplier=Jameco, ComponentLink4Description=https://datasheet.ciiva.com/15144/getdatasheetpartid-98336-15144809.pdf?src-supplier=Verical, ComponentLink4URL=https://datasheet.ciiva.com/15144/getdatasheetpartid-98336-15144809.pdf?src-supplier=Verical, ComponentLink5Description=https://datasheet.ciiva.com/1180/bat54clt1-d-1180248.pdf?src-supplier=Element14, ComponentLink5URL=https://datasheet.ciiva.com/1180/bat54clt1-d-1180248.pdf?src-supplier=Element14, ComponentLink6Description=https://datasheet.ciiva.com/1180/bat54clt1-d-1180247.pdf?src-supplier=Element14, ComponentLink6URL=https://datasheet.ciiva.com/1180/bat54clt1-d-1180247.pdf?src-supplier=Element14, ComponentLink7Description=https://datasheet.ciiva.com/22659/1918740-22659014.pdf?src-supplier=Element14, ComponentLink7URL=https://datasheet.ciiva.com/22659/1918740-22659014.pdf?src-supplier=Element14, ComponentLink8Description=https://datasheet.ciiva.com/28655/bat54clt1-d-28655787.pdf?src-supplier=Element14, ComponentLink8URL=https://datasheet.ciiva.com/28655/bat54clt1-d-28655787.pdf?src-supplier=Element14, ComponentLink9Description=https://datasheet.ciiva.com/8294/bat54clt1-d-8294495.pdf?src-supplier=Avnet, ComponentLink9URL=https://datasheet.ciiva.com/8294/bat54clt1-d-8294495.pdf?src-supplier=Avnet, ComponentLink10Description=https://datasheet.ciiva.com/16205/bat54clt1-d-16205033.pdf?src-supplier=Future+Electronics, ComponentLink10URL=https://datasheet.ciiva.com/16205/bat54clt1-d-16205033.pdf?src-supplier=Future+Electronics, ComponentLink11Description=https://datasheet.ciiva.com/905/bat54clt1-d-905835.pdf?src-supplier=Digi-Key, ComponentLink11URL=https://datasheet.ciiva.com/905/bat54clt1-d-905835.pdf?src-supplier=Digi-Key, Contact Plating=Tin,Matte, Current Rating=200mA, Element Configuration="Common Cathode", Forward Current=200mA, Halogen Free="Halogen Free", Height=1.01mm, Lead Free="Lead Free", Length=3.04mm, Manufacturer Part Number=BAT54CLT1G, Max Reverse Leakage Current=2uA, Max Reverse Voltage (DC)=30V, Max Surge Current=600mA, Number of Pins=3, Packaging="Tape and Reel", Peak Non-Repetitive Surge Current=600mA, Power Dissipation=225mW, Pricing 1="1=0.17000, 10=0.15600, 100=0.08490, 500=0.05224, 1000=0.03562 (USD)", Radiation Hardening=No, REACH SVHC="No SVHC", Recovery Time=5ns, Reverse Recovery Time=5ns, RoHS=Yes, Supplier 1=Digi-Key, Voltage Rating (DC)=30V, Width=1.4mm
J1: library part 22-28-4020, "CONN HEADER VERT 2POS 2.54MM", Color=Black, Contact Resistance=20mR, Current Rating=4A, Flammability Rating="UL94 V-0", Manufacturer=Molex, Max Operating Temperature=75°C, Max Voltage Rating (AC)=250V, Min Operating Temperature=0°C, Package Quantity=1, Supplier Part Number 1=WM50014-02-ND, Category="Headers and Wire Housings", ComponentLink1Description=https://datasheet.ciiva.com/1433/1596842-1433683.pdf?src-supplier=Element14, ComponentLink1URL=https://datasheet.ciiva.com/1433/1596842-1433683.pdf?src-supplier=Element14, ComponentLink2Description=https://datasheet.ciiva.com/30153/214440022284020-pcb-headers-30153261.pdf?src-supplier=Onlinecomponents.com, ComponentLink2URL=https://datasheet.ciiva.com/30153/214440022284020-pcb-headers-30153261.pdf?src-supplier=Onlinecomponents.com, ComponentLink3Description=https://datasheet.ciiva.com/16658/0022284020-pcb-headers-16658182.pdf?src-supplier=Avnet+Europe, ComponentLink3URL=https://datasheet.ciiva.com/16658/0022284020-pcb-headers-16658182.pdf?src-supplier=Avnet+Europe, ComponentLink4Description=https://datasheet.ciiva.com/5157/0022284020-pcb-headers-228358-5157523.pdf?src-supplier=Mouser, ComponentLink4URL=https://datasheet.ciiva.com/5157/0022284020-pcb-headers-228358-5157523.pdf?src-supplier=Mouser, ComponentLink5Description=https://datasheet.ciiva.com/15217/getdatasheetpartid-127875-15217702.pdf?src-supplier=Verical, ComponentLink5URL=https://datasheet.ciiva.com/15217/getdatasheetpartid-127875-15217702.pdf?src-supplier=Verical, ComponentLink6Description=https://datasheet.ciiva.com/10088/0022284020-pcb-headers-10088332.pdf?src-supplier=Avnet, ComponentLink6URL=https://datasheet.ciiva.com/10088/0022284020-pcb-headers-10088332.pdf?src-supplier=Avnet, ComponentLink7Description=https://datasheet.ciiva.com/49385/879406-49385687.pdf?src-supplier=Jameco, ComponentLink7URL=https://datasheet.ciiva.com/49385/879406-49385687.pdf?src-supplier=Jameco, Connector Type="Male Pin", Contact Material=Brass,Bronze, Contact Mating Length=0.24inch, Contact Plating=Tin, Contact Type="Male Pin", Depth=2.49mm, Gender=Male, Glow Wire Compliant=Non-compliant, Housing Color=Black, Housing Material=Nylon, Lead Free="Lead Free", Manufacturer Part Number=22-28-4020, Max Voltage Rating (DC)=250V, Mount="Through Hole", Number of Circuits=2, Number of Contacts=2, Number of Positions=2, Number of Rows=1, Orientation=Straight, Packaging=Bulk, Pitch=2.54mm, Pricing 1="1=0.12000, 10=0.08200, 100=0.05890 (USD)", Radiation Hardening=No, REACH SVHC=Unknown, RoHS=Yes, Series="KK® 42375", Stock 1=3528, Supplier 1=Digi-Key, Termination=Solder, Voltage Rating=250V, Voltage Rating (DC)=250V
J2: library part A2541HWR-6P, Manufacturer="CJT Connectors", Supplier Part Number 1=C225514, Manufacturer Part Number=A2541HWR-6P, Pricing 1="1=1.41510, 10=1.13220, 30=1.08030, 100=1.02830, 500=1.00520, 1000=0.99380, 1=1.36720, 10=1.09390, 30=1.04380, 100=0.99360, 500=0.97130, 1000=0.96020, 1=7.15180, 10=5.72210, 30=5.46000, 100=5.19730, 500=5.08050, 1000=5.02280, 1=6.79030, 10=5.43280, 30=5.18400, 100=4.93460, 500=4.82370, 1000=4.76890, 1=0.91320, 10=0.73070, 30=0.69720, 100=0.66370, 500=0.64870, 1000=0.64140, 1=0.79380, 10=0.63510, 30=0.60600, 100=0.57690, 500=0.56390, 1000=0.55750, 1=8.55700, 10=6.84640, 30=6.53280, 100=6.21850, 500=6.07880, 1000=6.00970, 1=119.38420, 10=95.51820, 30=91.14350, 100=86.75790, 500=84.80880, 1000=83.84510, 1=4.51910, 10=3.61570, 30=3.45010, 100=3.28410, 500=3.21030, 1000=3.17390, 1=82.66820, 10=66.14210, 30=63.11280, 100=60.07600, 500=58.72630, 1000=58.05890, 1=9.24660, 10=7.39810, 30=7.05930, 100=6.71960, 500=6.56860, 1000=6.49400, 1=1.46250, 10=1.17010, 30=1.11650, 100=1.06280, 500=1.03890, 1000=1.02710, 1=1.10250, 10=0.88210, 30=0.84170, 100=0.80120, 500=0.78320, 1000=0.77430 (AUD)", Stock 1=3270, Supplier 1=LCSC
J3: library part UX60SC-MB-5S8, "Conn Mini USB 2.0 Type B RCP 5 POS 0.8mm Solder RA SMD 5 Terminal 1 Port Embossed T/R", Current Rating=1A, Insulation Resistance=100MR, Manufacturer=Hirose, Max Operating Temperature=75°C, Max Voltage Rating (AC)=5V, Min Operating Temperature=-30°C, Package Quantity=1000, Supplier Part Number 1=H11589CT-ND, Category="USB Connectors", ComponentLink1Description=https://datasheet.ciiva.com/22666/1693469-22666928.pdf?src-supplier=Element14, ComponentLink1URL=https://datasheet.ciiva.com/22666/1693469-22666928.pdf?src-supplier=Element14, ComponentLink2Description=https://datasheet.ciiva.com/15181/getdatasheetpartid-457316-15181367.pdf?src-supplier=Verical, ComponentLink2URL=https://datasheet.ciiva.com/15181/getdatasheetpartid-457316-15181367.pdf?src-supplier=Verical, ComponentLink3Description=https://datasheet.ciiva.com/4598/ed-ux-20140717-4598805.pdf?src-supplier=Mouser, ComponentLink3URL=https://datasheet.ciiva.com/4598/ed-ux-20140717-4598805.pdf?src-supplier=Mouser, Connector Type=USB,Receptacle, Contact Material="Copper Alloy,Copper", Contact Plating=Gold, Depth=7mm, Gender=Receptacle, Lead Free="Lead Free", Length=7.7mm, Manufacturer Part Number=UX60SC-MB-5S8, Max Current Rating=1A, Mount="Surface Mount,Horizontal,Through Hole", Number of Contacts=5, Number of Ports=1, Number of Positions=5, Number of Rows=1, Number of Terminals/Pins=5, Orientation="Right Angle", Packaging="Tape and Reel", Pitch=0.8mm, Pricing 1="1=0.99000, 10=0.86700, 25=0.81600, 50=0.78200, 100=0.74800, 250=0.68000, 500=0.61200 (USD)", REACH SVHC="No SVHC", RoHS=Yes, Series=UX60S, Stock 1=1825, Supplier 1=Digi-Key, Termination=Solder, USB Standard="USB 2.0"
K1 K2 K3 K4: library part "Keyboard Switch"
LDO1: library part AMS1117-5.0, Case/Package=Module, Manufacturer="Advanced Monolithic Systems", Supplier Part Number 1=C6187, Manufacturer Part Number=AMS1117-5.0, Pricing 1="1=1.19980, 10=0.91640, 30=0.86440, 100=0.81230, 500=0.78920, 1000=0.77780, 1=1.15930, 10=0.88550, 30=0.83520, 100=0.78490, 500=0.76260, 1000=0.75150, 1=6.06400, 10=4.63160, 30=4.36890, 100=4.10560, 500=3.98880, 1000=3.93110, 1=5.75740, 10=4.39750, 30=4.14810, 100=3.89800, 500=3.78720, 1000=3.73230, 1=0.77430, 10=0.59140, 30=0.55790, 100=0.52430, 500=0.50930, 1000=0.50200, 1=0.67310, 10=0.51410, 30=0.48490, 100=0.45570, 500=0.44270, 1000=0.43630, 1=7.25540, 10=5.54170, 30=5.22730, 100=4.91220, 500=4.77250, 1000=4.70340, 1=101.22480, 10=77.31550, 30=72.92990, 100=68.53360, 500=66.58440, 1000=65.62070, 1=3.83170, 10=2.92670, 30=2.76070, 100=2.59430, 500=2.52050, 1000=2.48400, 1=70.09360, 10=53.53750, 30=50.50070, 100=47.45640, 500=46.10670, 1000=45.43940, 1=7.84010, 10=5.98830, 30=5.64860, 100=5.30810, 500=5.15710, 1000=5.08250, 1=1.24000, 10=0.94710, 30=0.89340, 100=0.83960, 500=0.81570, 1000=0.80390, 1=0.93480, 10=0.71400, 30=0.67350, 100=0.63290, 500=0.61490, 1000=0.60600 (AUD)", RoHS=Yes, Stock 1=41515, Supplier 1=LCSC
R1 R4: library part 0805W8F1002T5E, Manufacturer=Uniroyal, Supplier Part Number 1=C17414, Manufacturer Part Number=0805W8F1002T5E, Pricing 1="100=0.01880, 1000=0.01500, 3000=0.01410, 10000=0.01280, 50000=0.01230, 100000=0.01220, 100=0.01820, 1000=0.01450, 3000=0.01360, 10000=0.01240, 50000=0.01190, 100000=0.01180, 100=0.09500, 1000=0.07590, 3000=0.07110, 10000=0.06490, 50000=0.06200, 100000=0.06150, 100=0.09020, 1000=0.07200, 3000=0.06750, 10000=0.06160, 50000=0.05890, 100000=0.05840, 100=0.01210, 1000=0.00970, 3000=0.00910, 10000=0.00830, 50000=0.00790, 100000=0.00790, 100=0.01050, 1000=0.00840, 3000=0.00790, 10000=0.00720, 50000=0.00690, 100000=0.00680, 100=0.11370, 1000=0.09080, 3000=0.08500, 10000=0.07760, 50000=0.07420, 100000=0.07360, 100=1.58590, 1000=1.26640, 3000=1.18660, 10000=1.08270, 50000=1.03480, 100000=1.02680, 100=0.06000, 1000=0.04790, 3000=0.04490, 10000=0.04100, 50000=0.03920, 100000=0.03890, 100=1.09820, 1000=0.87690, 3000=0.82170, 10000=0.74980, 50000=0.71650, 100000=0.71100, 100=0.12280, 1000=0.09810, 3000=0.09190, 10000=0.08390, 50000=0.08010, 100000=0.07950, 100=0.01940, 1000=0.01550, 3000=0.01450, 10000=0.01330, 50000=0.01270, 100000=0.01260, 100=0.01465, 1000=0.01170, 3000=0.01096, 10000=0.01000, 50000=0.00956, 100000=0.00948 (AUD)", RoHS=Yes, RoHS Compliant=Yes, Stock 1=3620200, Supplier 1=LCSC
R2 R3: library part 0805W8F220JT5E, Manufacturer=Uniroyal, Supplier Part Number 1=C17561, Manufacturer Part Number=0805W8F220JT5E, RoHS=Yes, Supplier 1=LCSC
SW1: library part TS-1187A-B-A-B, Manufacturer="XKB Connectivity", Supplier Part Number 1=C318884, Manufacturer Part Number=TS-1187A-B-A-B, Pricing 1="50=0.11010, 500=0.08490, 1500=0.07860, 5000=0.07040, 25000=0.06670, 50000=0.06600, 50=0.10630, 500=0.08200, 1500=0.07600, 5000=0.06810, 25000=0.06440, 50000=0.06380, 50=0.55630, 500=0.42910, 1500=0.39730, 5000=0.35600, 25000=0.33690, 50000=0.33380, 50=0.52810, 500=0.40740, 1500=0.37720, 5000=0.33800, 25000=0.31990, 50000=0.31690, 50=0.07100, 500=0.05480, 1500=0.05070, 5000=0.04550, 25000=0.04300, 50000=0.04260, 50=0.06170, 500=0.04760, 1500=0.04410, 5000=0.03950, 25000=0.03740, 50000=0.03700, 50=0.66550, 500=0.51340, 1500=0.47540, 5000=0.42590, 25000=0.40310, 50000=0.39930, 50=9.28540, 500=7.16310, 1500=6.63250, 5000=5.94270, 25000=5.62430, 50000=5.57130, 50=0.35150, 500=0.27110, 1500=0.25110, 5000=0.22500, 25000=0.21290, 50000=0.21090, 50=6.42970, 500=4.96010, 1500=4.59270, 5000=4.11500, 25000=3.89460, 50000=3.85780, 50=0.71920, 500=0.55480, 1500=0.51370, 5000=0.46030, 25000=0.43560, 50000=0.43150, 50=0.11380, 500=0.08780, 1500=0.08130, 5000=0.07280, 25000=0.06890, 50000=0.06830, 50=0.08575, 500=0.06615, 1500=0.06125, 5000=0.05488, 25000=0.05194, 50000=0.05145 (AUD)", Stock 1=50, Supplier 1=LCSC
U1: library part ATMEGA32U2-AUR, "IC MCU 8BIT 32KB FLASH 32TQFP", Case/Package=TQFP, Frequency=16MHz, Manufacturer="Microchip / Atmel", Max Operating Temperature=85°C, Max Supply Voltage=5.5V, Min Operating Temperature=-40°C, Min Supply Voltage=2.7V, Package Quantity=1, Supplier Part Number 1=ATMEGA32U2-AURCT-ND, Category=Microcontrollers, ComponentLink1Description=https://datasheet.ciiva.com/6641/doc7799-6641085.pdf?src-supplier=Digi-Key, ComponentLink1URL=https://datasheet.ciiva.com/6641/doc7799-6641085.pdf?src-supplier=Digi-Key, ComponentLink2Description=https://datasheet.ciiva.com/9234/doc7799-9234685.pdf?src-supplier=Avnet, ComponentLink2URL=https://datasheet.ciiva.com/9234/doc7799-9234685.pdf?src-supplier=Avnet, ComponentLink3Description=https://datasheet.ciiva.com/6641/doc7799-6641080.pdf?src-supplier=Digi-Key, ComponentLink3URL=https://datasheet.ciiva.com/6641/doc7799-6641080.pdf?src-supplier=Digi-Key, ComponentLink4Description=https://datasheet.ciiva.com/6641/doc7799-6641083.pdf?src-supplier=Digi-Key, ComponentLink4URL=https://datasheet.ciiva.com/6641/doc7799-6641083.pdf?src-supplier=Digi-Key, Contact Plating=Tin,Matte, Core Architecture=AVR, Data Bus Width=8b, Interface=SPI,USB,UART,USART, Manufacturer Part Number=ATMEGA32U2-AUR, Max Frequency=16MHz, Memory Size=32KB, Memory Type=FLASH, Mount="Surface Mount", Number of I/Os=22, Number of Pins=32, Number of Programmable I/O=22, Number of Timers/Counters=2, Oscillator Type=Internal, Packaging="Tape and Reel", Peripherals="Brown-out Detect/Reset,POR,PWM,WDT", Pricing 1="1=3.60000, 25=3.30040, 100=2.97850 (USD)", RAM Size=1KB, RoHS=Yes, RoHS Compliant=Yes, Series="AVR® ATmega", Stock 1=2741, Supplier 1=Digi-Key, Watchdog Timer=Yes
Y1: library part X1E0000210264, Manufacturer=Seiko, Supplier Part Number 1=C91744, Manufacturer Part Number=X1E0000210264, Pricing 1="1=2.09620, 10=1.67710, 30=1.60010, 100=1.52310, 500=1.48900, 1000=1.47200, 1=2.02540, 10=1.62050, 30=1.54610, 100=1.47170, 500=1.43870, 1000=1.42230, 1=10.59440, 10=8.47640, 30=8.08720, 100=7.69800, 500=7.52550, 1000=7.43980, 1=10.05890, 10=8.04800, 30=7.67840, 100=7.30890, 500=7.14500, 1000=7.06370, 1=1.35280, 10=1.08240, 30=1.03270, 100=0.98300, 500=0.96090, 1000=0.95000, 1=1.17590, 10=0.94090, 30=0.89760, 100=0.85440, 500=0.83530, 1000=0.82580, 1=12.67600, 10=10.14190, 30=9.67620, 100=9.21050, 500=9.00410, 1000=8.90160, 1=176.85110, 10=141.49600, 30=134.99890, 100=128.50180, 500=125.62140, 1000=124.19210, 1=6.69450, 10=5.35620, 30=5.11020, 100=4.86430, 500=4.75520, 1000=4.70110, 1=122.46140, 10=97.97960, 30=93.48070, 100=88.98170, 500=86.98720, 1000=85.99740, 1=13.69750, 10=10.95920, 30=10.45600, 100=9.95270, 500=9.72970, 1000=9.61890, 1=2.16650, 10=1.73340, 30=1.65380, 100=1.57420, 500=1.53890, 1000=1.52140, 1=1.63320, 10=1.30670, 30=1.24670, 100=1.18670, 500=1.16010, 1000=1.14690 (AUD)", RoHS=No, Stock 1=1224, Supplier 1=LCSC

## Via types
v1: diameter 0.6, hole 0.3, Top Layer to Bottom Layer, 29 vias

## Nets (pads, with @x,y where several pads share a name; then routed paths per layer and width w, separated by ;. In a path a pad name is that pad's centre, name@x,y a point inside that pad or via, vN(x,y) a via of type N, cw(c..) or ccw(c..) an arc to the next point about the centre after c; other vN are vias at no path point)
col0: K1.2 K2.2 U1.39 | length 79.1
  Top Layer w0.3: K1.2 15.919,39.631 17.2,38.35 17.2,21.214 15.92,19.934 K2.2 15.92,19.395 18.364,16.95 20.55,16.95 29.675,7.825 58.175,7.825 59.425,9.075 v1(59.425,13.475)
  Bottom Layer w0.3: v1(59.425,13.475) 59.425,13.556 59.6,13.731 U1.39
col1: K3.2 K4.2 U1.38 | length 56.9
  Top Layer w0.3: K3.2 36.119,40.095 37.375,38.839 37.375,21.189 36.12,19.934 K4.2 38.636,19.664 49.375,8.925 57.3,8.925 v1(57.325,8.95)
  Bottom Layer w0.3: v1(57.325,8.95) 60.4,12.025 U1.38
D+: J3.3 R3.2 | length 30
  Top Layer w0.3: v1(52,41) 52.025,41.025 73.875,41.025 v1(74.25,41.4)
  Bottom Layer w0.3: R3.2 49.775,38.775 v1(52,41) ; v1(74.25,41.4) J3.3
D-: J3.2 R2.2 | length 33.2
  Top Layer w0.3: v1(47.625,39.85) 47.825,39.85 47.85,39.875 72.914,39.875 73.414,40.375 v1(73.475,40.375)
  Bottom Layer w0.3: R2.2 46.1,38.325 v1(47.625,39.85) ; J3.2 73.45,40.4 v1(73.475,40.375)
GND: C1.1 C2.1 C3.1 C4.1 C5.1 C6.1 C7.1 C8.1 J1.2 J2.3 J3.4 J3.5 J3.S1 J3.S2 J3.S3 J3.S4 LDO1.2 R4.2 SW1.3 SW1.4 U1.5 U1.15 U1.23 U1.35 U1.43 Y1.2 Y1.4 | length 189.7
  Top Layer w0.5: v1(58,30.175) 59.781,31.956 59.781,32.031 v1(59.8,32.05) ; v1(61.75,10.575) 62.2,10.125 64.2,10.125 65.525,11.45 65.525,13.15 ; v1(65.525,14.325) 65.525,13.15 ; v1(71.05,14.175) 66.55,14.175 65.525,13.15
  Bottom Layer w0.3: 52.575,22.1 U1.5 55.225,22.1 55.25,22.125 ; 56.4,15.875 U1.43 ; 58,27.3 U1.15 58,29.775 ; 62.8,15.925 U1.35 ; U1.23 65.3,26.88 66.345,26.88 66.35,26.875 ; J3.4 75.05,41.8 75.65,41.8 75.85,42 J3.5 75.85,44.4 75.8,44.45
  Bottom Layer w0.5: C6.1 49.513,25.938 49.513,21.613 C5.1 51.438,21.6 51.937,22.1 52.575,22.1 ; C4.1 C7.1 58.625,35.925 59.008,36.308 62.106,36.308 Y1.2 ; 55.25,22.125 58,24.875 58,27.3 ; 56.4,15.875 56.375,15.85 56.375,14.25 55.65,13.525 C1.1 55.65,4.55 56.9,3.3 56.9,2.95 57.15,2.7 SW1.4 57.85,2.7 58.825,1.725 62.775,1.725 63.75,2.7 SW1.3 64.45,2.7 64.7,2.95 64.7,3.075 68.625,7 68.625,9.225 73.615,14.215 ; 58,29.775 v1(58,30.175) ; v1(59.8,32.05) 59.819,32.069 60.295,32.069 61.823,33.597 Y1.4 61.894,33.692 61.894,34.611 61.99,34.707 61.99,35.697 62.177,35.884 Y1.2 ; v1(61.75,10.575) 61.738,10.587 61.738,12.187 C2.1 61.725,14.85 62.8,15.925 ; v1(65.525,14.325) 65.55,14.35 65.55,14.5 68.15,17.1 R4.2 ; 66.35,26.875 68.175,26.875 69.325,28.025 C3.1 ; C8.1 C8.1@67.375,34.05 ; J3.S3@70.7,48.175 69.375,48.175 69.082,47.882 69.082,47.468 70.6,45.95 J3.S1 ; v1(71.05,14.175) 71.09,14.215 73.615,14.215 ; 75.05,41.8 75.05,40.225 75.505,39.77 J1.2 ; LDO1.2 LDO1.2@75.278,27.2 ; 78.15,48.225 78.475,48.225 79.093,47.607 79.093,47.193 77.9,46 J3.S2 76.75,45.4 75.8,44.45 72.65,44.45 71.7,45.4 J3.S1 ; Y1.2 62.177,36.403 65.9,40.125 ; 65.9,40.125 70.6,44.826 J3.S1 ; 65.9,40.125 65.9,39.95 68.45,37.4 68.45,35.125 C8.1@67.375,34.05 ; C8.1@67.375,34.05 69.625,31.8 C3.1 ; C3.1 74.452,28.025 LDO1.2@75.278,27.2 ; 73.615,14.215 J2.3 75.018,14.483 76.04,14.483 76.675,15.118 76.675,20.95 73.9,23.725 73.9,25.822 LDO1.2@75.278,27.2
NetC6_2: C6.2 U1.6 | length 8.4
  Bottom Layer w0.3: C6.2 49.524,27.826 50.424,27.826 51.5,26.75 51.5,23.425 52.005,22.92 53.9,22.92 U1.6
NetD1_1: D1.1 K1.1 | length 8.9
  Bottom Layer w0.3: K1.1 9.54,38.49 9.54,34.174 12.062,31.652 D1.1
NetD2_1: D2.1 K2.1 | length 9.2
  Bottom Layer w0.3: K2.1 9.54,17.79 9.54,13.174 12.062,10.652 D2.1
NetD3_1: D3.1 K3.1 | length 8.9
  Bottom Layer w0.3: K3.1 29.74,38.49 29.74,34.213 32.3,31.652 D3.1
NetD4_1: D4.1 K4.1 | length 9.2
  Bottom Layer w0.3: K4.1 29.74,17.79 29.74,13.212 32.3,10.652 D4.1
NetD5_1: D5.1 LDO1.3 | length 16.5
  Top Layer w0.5: v1(71.375,32.525) 73.681,30.219 73.806,30.219 v1(73.825,30.2)
  Bottom Layer w0.5: v1(71.375,32.525) 70.425,33.475 70.425,38.95 71,39.525 71.8,39.525 72.3,39.025 D5.1 ; v1(73.825,30.2) 73.852,30.2 74.277,29.775 75.71,29.775 LDO1.3
NetJ1_1: J1.1 LDO1.1 | length 15.1
  Bottom Layer w0.5: LDO1.1 76.692,24.9 78.8,27.008 78.8,32.875 81.7,35.775 J1.1
NetR2_1: R2.1 U1.3 | length 20.9
  Top Layer w0.3: v1(46.075,32.6) 46.075,21.4 46.975,20.5 v1(51.5,20.5)
  Bottom Layer w0.3: v1(46.075,32.6) 46.075,34.025 R2.1 ; v1(51.5,20.5) U1.3
NetR3_1: R3.1 U1.4 | length 17.2
  Top Layer w0.3: v1(49.775,32.525) 55.45,26.85 55.45,24.8 56.05,24.2 v1(56.05,21.7)
  Bottom Layer w0.3: v1(49.775,32.525) R3.1 ; U1.4 55.569,21.3 55.969,21.7 v1(56.05,21.7)
NetR4_1: R4.1 U1.33 | length 4.4
  Bottom Layer w0.3: U1.33 65.3,18.92 69.52,18.92 R4.1
RESET: R1.2 SW1.1 SW1.2 U1.13 | length 39.6
  Top Layer w0.3: v1(56.5,25.15) 56.5,25.1 57.75,23.85 60.65,20.95 v1(60.65,8.425)
  Bottom Layer w0.3: U1.13 56.4,25.331 56.5,25.231 v1(56.5,25.15) ; SW1.2 57.5,7.2 57.75,7.45 61.675,7.45 ; v1(60.65,8.425) 60.7,8.425 61.675,7.45 ; R1.2 68.7,10.65 64.45,6.4 SW1.1 64.075,6.425 64.075,7.175 63.8,7.45 61.675,7.45
row0: D1.2 D3.2 U1.41 | length 55.4
  Top Layer w0.3: v1(49.525,14.325) 57.225,14.325 v1(57.975,15.075)
  Bottom Layer w0.3: D1.2 16.863,29.975 34.052,29.975 D3.2 35.577,28.323 49.525,14.375 v1(49.525,14.325) ; v1(57.975,15.075) 57.987,15.087 57.987,17.207 U1.41
row1: D2.2 D4.2 U1.40 | length 50.3
  Top Layer w0.3: v1(49.65,10.55) 56.875,10.55 58.644,12.319 v1(58.644,14.25)
  Bottom Layer w0.3: D2.2 16.838,9 34.077,9 D4.2 49.6,10.5 v1(49.65,10.55) ; v1(58.644,14.25) 58.65,14.256 58.65,14.725 58.8,14.875 U1.40
RXD: J2.5 U1.20 | length 30
  Top Layer w0.3: v1(62.075,24.525) 62.075,22.05 62.775,21.35 71.7,21.35 72.175,20.875 72.175,11.71 J2.5
  Bottom Layer w0.3: U1.20 62.02,28.56 62.02,24.58 v1(62.075,24.525)
TXD: J2.4 U1.21 | length 30.7
  Top Layer w0.3: v1(63.225,25.35) 63.225,25.2 63.2,25.175 63.2,22.65 63.75,22.1 76.175,22.1 76.625,21.65 76.625,13.55 J2.4
  Bottom Layer w0.3: U1.21 62.8,25.856 63.225,25.431 v1(63.225,25.35)
V_USB: D5.2 J3.1 | length 6.1
  Bottom Layer w0.3: 72.65,41.8 J3.1
  Bottom Layer w0.5: 72.65,41.8 72.65,40 74.179,38.471 74.179,37.581 D5.2
VCC: C1.2 C2.2 C3.2 C4.2 C5.2 D5.3 J2.2 R1.1 U1.2 U1.7 U1.14 U1.24 U1.34 U1.44 | length 107.3
  Top Layer w0.5: v1(57.225,26.8) 63.6,26.8 v1(63.625,26.775) ; v1(71.325,26.075) 72.15,26.9 v1(72.15,30.2)
  Bottom Layer w0.3: 52.493,23.7 U1.7 ; 52.675,19.7 U1.2 55,19.7 55.025,19.675 ; 55.6,15.615 55.65,15.665 55.65,16.437 55.62,16.467 55.62,17.2 U1.44 55.62,17.24 55.62,18.42 55.625,18.425 ; 57.2,30 U1.14 57.2,27.3 57.225,27.275 ; U1.34 63.62,17.2 63.62,15.98 63.625,15.975 ; v1(63.625,26.775) 64.28,26.12 65.26,26.12 U1.24 65.3,26.08 66.033,26.08 66.038,26.075 66.6,26.075
  Bottom Layer w0.5: 52.493,23.7 52.2,23.993 52.2,32.975 52.25,33.025 52.25,33.125 ; 52.675,19.7 C5.2 47.693,19.7 47.4,19.993 47.4,28.275 52.25,33.125 ; C1.2 53.75,13.765 55.6,15.615 ; 55.025,19.675 55.625,19.075 55.625,18.425 ; 57.2,30 57.2,30.575 53.75,34.025 C4.2 53.15,34.025 52.25,33.125 ; v1(57.225,26.8) 57.225,27.275 ; 63.625,15.975 C2.2 R1.1 66.8,12.5 69.875,15.575 71.055,16.755 J2.2 69.625,21.88 C3.2@69.625,26.094 ; 66.6,26.075 66.625,26.1 69.6,26.1 69.606,26.094 C3.2@69.625,26.094 ; C3.2 C3.2@69.625,26.094 ; v1(71.325,26.075) 71.306,26.094 C3.2@69.625,26.094 ; v1(72.15,30.2) 73.25,31.3 D5.3
XTAL1: C7.2 U1.16 Y1.1 | length 9.7
  Bottom Layer w0.3: C7.2 59.823,34.025 ; U1.16 58.8,33.002 59.823,34.025 ; Y1.1 59.823,34.025
XTAL2: C8.2 U1.17 Y1.3 | length 12.2
  Bottom Layer w0.3: U1.17 59.613,28.593 59.613,29.638 63.308,33.333 63.308,35.106 Y1.3 64.152,35.95 C8.2
pads on no net: J2.1 J2.6 K1.Un1 K1.Un2 K1.Un3 K2.Un1 K2.Un2 K2.Un3 K3.Un1 K3.Un2 K3.Un3 K4.Un1 K4.Un2 K4.Un3 LDO1.4 U1.1 U1.8 U1.9 U1.10 U1.11 U1.12 U1.18 U1.19 U1.22 U1.25 U1.26 U1.27 U1.28 U1.29 U1.30 U1.31 U1.32 U1.36 U1.37 U1.42